# EAGLE board DIDV_-_Baixa_Latencia (EAGLE 6.2)
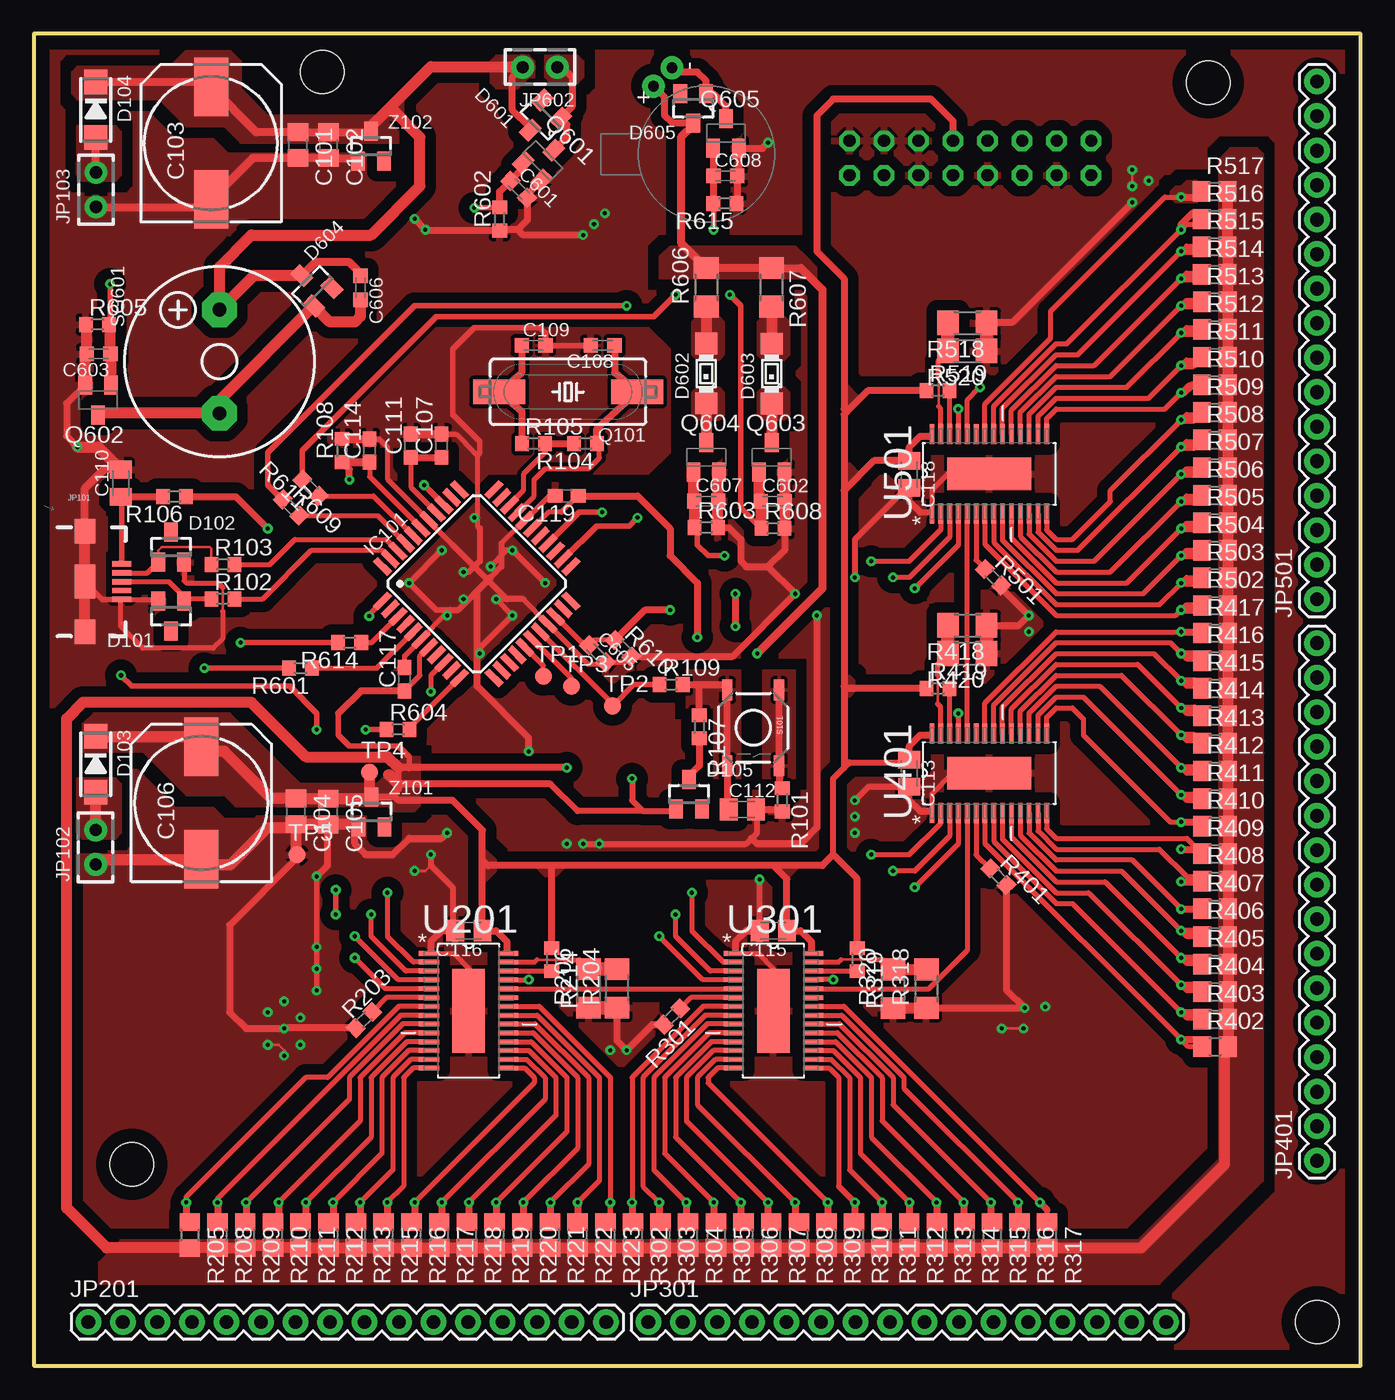
[diagram p0: board, top side]
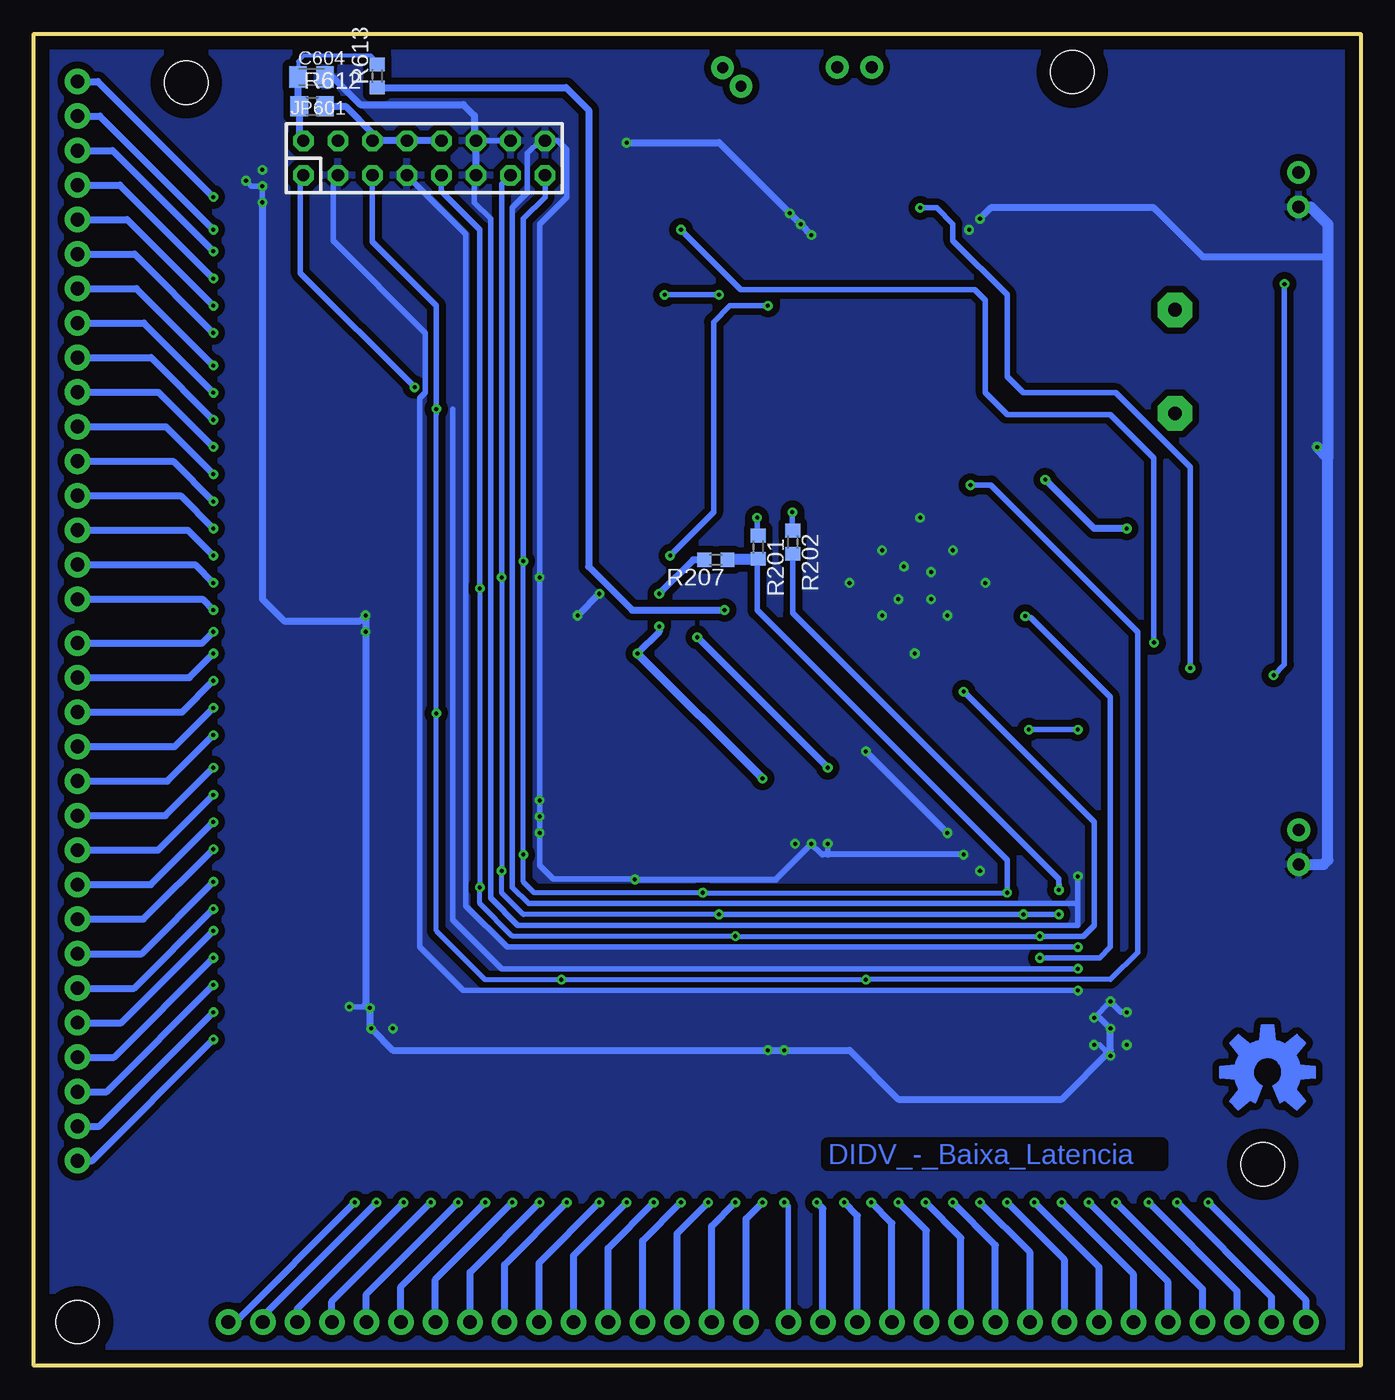
[diagram p1: board, bottom side, seen from below]

Size 97.6 x 98 mm. Coordinates in mm from the lower left corner, seen from the top.
Outline: 0,0 97.6,0 97.6,98 0,98 0,0
Copper layers (1*16): Top 0.035mm / dielectric 1.5mm / Bottom 0.035mm
Design rules: minimum track width 10mil, minimum drill 24mil, track to track 4mil, track to pad 4mil, pad to pad 4mil, via to via 4mil, smd to smd 4mil, copper to edge 40mil, drill to drill 8mil, minimum pad ring 10mil, minimum via ring 8mil, stop-mask expansion 4mil, vias tented up to drill 0mil, thermal gap 10mil
Holes 3.2 mm at 94.4,3.2 86.4,94.4 21.2,95.2 7.2,14.8

## Footprints (pad centres in the part's own frame; a part is rotated, then mirrored left to right if it is on the bottom)
C0805 = smd 1.3 x 1.5: 1 -0.95,0; 2 0.95,0
140CLH-1014 = smd 4.3 x 2.5: + 4.15,0; - -4.15,0
C0603 = smd 1.1 x 1: 1 -0.85,0; 2 0.85,0
C0603K = smd 1.05 x 1.08: 1 -0.875,0; 2 0.875,0
C0805K = smd 1.3 x 1.6: 1 -1,0; 2 1,0
SOT23 = smd 1 x 1.4: 1 -0.95,-1.1; 2 0.95,-1.1; 3 0,1.1
DO214AC = smd 1.8 x 1.7: A 2.05,0; C -2.05,0
SOT23@1 = smd 1 x 1.4: 1 -0.95,-1.1; 2 0.95,-1.1; 3 0,1.1
MINI-TOPLED-SANTANA = smd 1.6 x 1.6: A 0,2.2; C 0,-2.2
TQFP44 = smd 1.5 x 0.5: 1 -5.8,4; 2 -5.8,3.2; 3 -5.8,2.4; 4 -5.8,1.6; 5 -5.8,0.8; 6 -5.8,0; 7 -5.8,-0.8; 8 -5.8,-1.6; 9 -5.8,-2.4; 10 -5.8,-3.2; 11 -5.8,-4; 23 5.8,-4; 24 5.8,-3.2; 25 5.8,-2.4; 26 5.8,-1.6; 27 5.8,-0.8; 28 5.8,0; 29 5.8,0.8; 30 5.8,1.6; 31 5.8,2.4; 32 5.8,3.2; 33 5.8,4 | smd 0.5 x 1.5: 12 -4,-5.8; 13 -3.2,-5.8; 14 -2.4,-5.8; 15 -1.6,-5.8; 16 -0.8,-5.8; 17 0,-5.8; 18 0.8,-5.8; 19 1.6,-5.8; 20 2.4,-5.8; 21 3.2,-5.8; 22 4,-5.8; 34 4,5.8; 35 3.2,5.8; 36 2.4,5.8; 37 1.6,5.8; 38 0.8,5.8; 39 0,5.8; 40 -0.8,5.8; 41 -1.6,5.8; 42 -2.4,5.8; 43 -3.2,5.8; 44 -4,5.8
USB-B-MICRO-SMD_V03 = smd 1.4 x 0.4: D+1 2.7,0; D-1 2.7,0.65; GND1 2.7,-1.3; ID1 2.7,-0.65; VBUS1 2.7,1.3 | smd 1.5 x 1.8: SHIELD1 0,3.7; SHIELD2 0,-3.7 | smd 1.5 x 2.5: SHIELD3 0,0
JP1Y = drill 0.9 pad 1.676: 1 0,-1.27; 2 0,1.27
1X16 = drill 1.016 pad 1.88: 1 0,0; 2 2.54,0; 3 5.08,0; 4 7.62,0; 5 10.16,0; 6 12.7,0; 7 15.24,0; 8 17.78,0; 9 20.32,0; 10 22.86,0; 11 25.4,0; 12 27.94,0; 13 30.48,0; 14 33.02,0; 15 35.56,0; 16 38.1,0
JP8Q = drill 0.9 pad 1.5 octagon: 1 -8.89,-1.27; 2 -8.89,1.27; 3 -6.35,-1.27; 4 -6.35,1.27; 5 -3.81,-1.27; 6 -3.81,1.27; 7 -1.27,-1.27; 8 -1.27,1.27; 9 1.27,-1.27; 10 1.27,1.27; 11 3.81,-1.27; 12 3.81,1.27; 13 6.35,-1.27; 14 6.35,1.27; 15 8.89,-1.27; 16 8.89,1.27
SM49 = smd 3.81 x 1.778: 1 -5.08,0; 2 5.08,0
SOT23-BEC = smd 1 x 1.4: B -0.95,-1.1; C 0,1.1; E 0.95,-1.1
R0603 = smd 1 x 1.1: 1 -0.85,0; 2 0.85,0
R1206 = smd 1.6 x 1.803: 1 -1.422,0; 2 1.422,0
R0805 = smd 1.3 x 1.5: 1 -0.95,0; 2 0.95,0
TACTILE-SWITCH-SMD = smd 1.524 x 0.762: 1 -2.794,1.905; 2 2.794,1.905; 3 -2.794,-1.905; 4 2.794,-1.905
F/CM12P = drill 1.016 pad 2.54 octagon: + 3.81,0; - -3.81,0
B1,27 = smd 1.27 x 1.27: TP 0,0
SOP65P640X120-29N = smd 1.473 x 0.356: 1 -2.921,4.216; 2 -2.921,3.581; 3 -2.921,2.921; 4 -2.921,2.286; 5 -2.921,1.626; 6 -2.921,0.965; 7 -2.921,0.33; 8 -2.921,-0.33; 9 -2.921,-0.965; 10 -2.921,-1.626; 11 -2.921,-2.286; 12 -2.921,-2.921; 13 -2.921,-3.581; 14 -2.921,-4.216; 15 2.921,-4.216; 16 2.921,-3.581; 17 2.921,-2.921; 18 2.921,-2.286; 19 2.921,-1.626; 20 2.921,-0.965; 21 2.921,-0.33; 22 2.921,0.33; 23 2.921,0.965; 24 2.921,1.626; 25 2.921,2.286; 26 2.921,2.921; 27 2.921,3.581; 28 2.921,4.216 | smd 2.388 x 6.172: 29 0,0
VIBE-MOTOR-10MM = drill 0.8 pad 1.676: + -5,-3.9; - -6.35,-2.54

## Placement (x,y rotation side)
C101  100nf/50V  [C0805]  19.41,89.82 270 top
C102  100nf/50V  [C0805]  21.67,89.82 270 top
C103  470uf/35V  [140CLH-1014]  13.03,89.96 90 top
C104  100nf/50V  [C0805]  19.27,40.78 270 top
C105  100nf/50V  [C0805]  21.65,40.78 270 top
C106  470uf/35V  [140CLH-1014]  12.32,41.4 90 top
C107  100n  [C0603]  29.98,67.69 90 top
C108  15p  [C0603K]  41.84,75.07 180 top
C109  15p  [C0603K]  36.76,75.07 0 top
C110  10n  [C0805K]  6.38,64.94 90 top
C111  100n  [C0603]  27.72,67.69 90 top
C112  1u  [C0805K]  52.11,40.93 0 top
C113  10n  [C0805K]  64.4,43.59 270 top
C114  10n  [C0603]  24.7,67.34 90 top
C115  10n  [C0805K]  54.39,32 180 top
C116  10n  [C0805K]  31.99,32 180 top
C117  10n  [C0603]  27.27,50.51 90 top
C118  10n  [C0805K]  64.4,65.59 270 top
C119  10n  [C0603]  39.21,64 180 top
C601  10nf/50V  [C0603K]  35.66,86.57 315 top
C602  10n  [C0603K]  54.35,63.6 0 top
C603  10nf/50V  [C0603K]  4.75,74.44 180 top
C604  10n  [C0805K]  77.18,94.84 0 bottom
C605  10n  [C0603K]  41.44,52.38 315 top
C606  10nf/50V  [C0603K]  24.02,79.31 270 top
C607  10n  [C0603K]  49.46,63.62 0 top
C608  10nf/50V  [C0603K]  50.87,87.55 0 top
D101  ESDAXXL  [SOT23]  10.09,55.15 180 top
D102  ESDAXXL  [SOT23]  10.09,60.23 0 top
D103  S1J  [DO214AC]  4.53,44.25 270 top
D104  S1J  [DO214AC]  4.56,92.42 270 top
D105  BAS21  [SOT23@1]  48.19,42.05 0 top
D601  BAS70  [SOT23]  37.29,91.69 135 top
D602  [MINI-TOPLED-SANTANA]  49.46,73.01 0 top
D603  [MINI-TOPLED-SANTANA]  54.28,72.99 0 top
D604  BAS70  [SOT23]  20.48,79.44 45 top
D605  BAS70  [SOT23]  48.5,92.52 180 top
IC101  PIC18F4550_TQFP44  [TQFP44]  32.58,57.54 45 top
JP101  [USB-B-MICRO-SMD_V03]  3.74,57.69 0 top
JP102  [JP1Y]  4.54,38.14 0 top
JP103  [JP1Y]  4.56,86.54 0 top
JP201  M16PTH  [1X16]  4,3.2 0 top
JP301  M16PTH  [1X16]  45.2,3.2 0 top
JP401  M16PTH  [1X16]  94.4,15.07 90 top
JP501  M16PTH  [1X16]  94.4,56.4 90 top
JP601  [JP8Q]  68.89,88.87 0 bottom
JP602  Rele_40A  [JP1Y]  37.23,95.56 90 top
LOGO101  OSHW-LOGOL  [OSHW-LOGO-L]  6.84,21.59 0 top
Q101  [SM49]  39.3,71.66 180 top
Q601  BC817  [SOT23-BEC]  37.45,88.68 315 top
Q602  BC817  [SOT23-BEC]  4.72,71.06 180 top
Q603  BC817  [SOT23-BEC]  54.28,66.84 0 top
Q604  BC817  [SOT23-BEC]  49.46,66.84 0 top
Q605  BC817  [SOT23-BEC]  50.91,90.68 0 top
R101  100  [R0603]  55.05,41.63 270 top
R102  22R  [R0603]  13.9,56.42 0 top
R103  22R  [R0603]  13.9,58.96 0 top
R104  1M  [R0603]  40.57,67.85 180 top
R105  100  [R0603]  36.76,67.85 0 top
R106  10k  [R0603]  10.34,63.95 180 top
R107  10k  [R0603]  48.95,47.01 270 top
R108  100k  [R0603]  22.66,67.34 90 top
R109  1k5  [R0603]  46.88,50.11 0 top
R201  22  [R0603]  44.32,60.23 270 bottom
R202  22  [R0603]  41.78,60.6 270 bottom
R203  10k  [R0603]  24.28,25.44 45 top
R204  RX  [R1206]  42.88,27.76 90 top
R205  [R0805]  11.46,9.6 270 top
R206  [R1206]  40.8,27.76 90 top
R207  [R0603]  47.44,59.3 180 bottom
R208  [R0805]  13.5,9.61 270 top
R209  [R0805]  15.55,9.62 270 top
R210  [R0805]  17.59,9.61 270 top
R211  [R0805]  19.62,9.61 270 top
R212  [R0805]  21.66,9.61 270 top
R213  [R0805]  23.69,9.61 270 top
R214  10k  [R0603]  38.08,29.88 270 top
R215  [R0805]  25.72,9.61 270 top
R216  [R0805]  27.77,9.61 270 top
R217  [R0805]  29.81,9.61 270 top
R218  [R0805]  31.85,9.61 270 top
R219  [R0805]  33.89,9.61 270 top
R220  [R0805]  35.92,9.61 270 top
R221  [R0805]  37.95,9.62 270 top
R222  [R0805]  40,9.6 270 top
R223  [R0805]  42.04,9.61 270 top
R301  10k  [R0603]  46.94,25.68 225 top
R302  [R0805]  44.08,9.6 270 top
R303  [R0805]  46.1,9.61 270 top
R304  [R0805]  48.12,9.6 270 top
R305  [R0805]  50.17,9.61 270 top
R306  [R0805]  52.21,9.61 270 top
R307  [R0805]  54.24,9.61 270 top
R308  [R0805]  56.27,9.6 270 top
R309  [R0805]  58.3,9.6 270 top
R310  [R0805]  60.33,9.6 270 top
R311  [R0805]  62.36,9.61 270 top
R312  [R0805]  64.39,9.61 270 top
R313  [R0805]  66.43,9.61 270 top
R314  [R0805]  68.46,9.6 270 top
R315  [R0805]  70.48,9.6 270 top
R316  [R0805]  72.51,9.61 270 top
R317  [R0805]  74.54,9.61 270 top
R318  RX  [R1206]  65.65,27.74 90 top
R319  10k  [R0603]  60.55,29.88 270 top
R320  [R1206]  63.2,27.73 90 top
R401  10k  [R0603]  70.94,35.97 315 top
R402  [R0805]  86.91,23.47 0 top
R403  [R0805]  86.9,25.49 0 top
R404  [R0805]  86.91,27.52 0 top
R405  [R0805]  86.91,29.55 0 top
R406  [R0805]  86.9,31.58 0 top
R407  [R0805]  86.9,33.61 0 top
R408  [R0805]  86.9,35.64 0 top
R409  [R0805]  86.9,37.66 0 top
R410  [R0805]  86.9,39.7 0 top
R411  [R0805]  86.9,41.73 0 top
R412  [R0805]  86.9,43.76 0 top
R413  [R0805]  86.9,45.79 0 top
R414  [R0805]  86.9,47.82 0 top
R415  [R0805]  86.9,49.85 0 top
R416  [R0805]  86.9,51.88 0 top
R417  [R0805]  86.9,53.91 0 top
R418  RX  [R1206]  68.66,54.47 180 top
R419  10k  [R0603]  66.51,49.83 0 top
R420  [R1206]  68.67,52.4 180 top
R501  10k  [R0603]  70.57,58.02 315 top
R502  [R0805]  86.9,55.94 0 top
R503  [R0805]  86.89,57.97 0 top
R504  [R0805]  86.89,59.99 0 top
R505  [R0805]  86.89,62.02 0 top
R506  [R0805]  86.89,64.05 0 top
R507  [R0805]  86.88,66.09 0 top
R508  [R0805]  86.88,68.12 0 top
R509  [R0805]  86.88,70.14 0 top
R510  [R0805]  86.88,72.17 0 top
R511  [R0805]  86.88,74.22 0 top
R512  [R0805]  86.88,76.25 0 top
R513  [R0805]  86.87,78.28 0 top
R514  [R0805]  86.87,80.31 0 top
R515  [R0805]  86.87,82.34 0 top
R516  [R0805]  86.87,84.37 0 top
R517  [R0805]  86.86,86.41 0 top
R518  RX  [R1206]  68.67,76.72 180 top
R519  10k  [R0603]  66.51,71.75 0 top
R520  [R1206]  68.67,74.66 180 top
R601  2k  [R0603]  19.61,51.32 180 top
R602  1k3  [R0603]  34.26,84.37 90 top
R603  2k  [R0603]  49.46,61.67 0 top
R604  2k  [R0603]  26.79,46.82 0 top
R605  1k3  [R0603]  4.68,76.62 0 top
R606  110  [R1206]  49.46,79.36 90 top
R607  110  [R1206]  54.27,79.36 270 top
R608  2k  [R0603]  54.36,61.62 0 top
R609  3k  [R0603]  18.91,63.15 315 top
R610  100k  [R0603]  43.33,52.79 315 top
R611  3k  [R0603]  20.35,64.61 135 top
R612  100k  [R0805]  77.13,92.68 0 bottom
R613  10k  [R0603]  72.35,94.9 90 bottom
R614  2k  [R0603]  23.23,53.2 180 top
R615  1k3  [R0603]  50.83,85.52 180 top
S101  [TACTILE-SWITCH-SMD]  52.91,46.93 270 top
SG601  [F/CM12P]  13.65,73.89 90 top
TP1  TPB1,27  [B1,27]  37.48,50.72 0 top
TP2  TPB1,27  [B1,27]  42.57,48.54 0 top
TP3  TPB1,27  [B1,27]  39.55,49.99 0 top
TP4  TPB1,27  [B1,27]  24.68,43.66 0 top
TP5  TPB1,27  [B1,27]  19.34,37.59 0 top
U201  TLC5940QPWPREP  [SOP65P640X120-29N]  31.98,26.11 0 top
U301  TLC5940QPWPREP  [SOP65P640X120-29N]  54.39,26.11 0 top
U401  TLC5940QPWPREP  [SOP65P640X120-29N]  70.29,43.6 90 top
U501  TLC5940QPWPREP  [SOP65P640X120-29N]  70.29,65.61 90 top
U$601  MOTOR10MM  [VIBE-MOTOR-10MM]  49.48,89.16 270 top
Z101  5v6  [SOT23]  24.84,40.75 0 top
Z102  12V6  [SOT23]  24.79,89.74 0 top

## Library data of the parts
C101-C119 C601-C608 R101-R109 R201-R223 R301-R320 R401-R420 R501-R520 R601-R615 = rcl
D101-D105 D601 D604 D605 Z101 Z102 = diode
D602 D603 = led
IC101 = microchip
JP101 = SparkFun-Connectors; PROD_ID: CONN-11752
JP102 JP103 JP601 JP602 = jumper
JP201 JP301 JP401 JP501 = SparkFun-Connectors
LOGO101 = OpenHW_BOT
Q101 = crystal; OC_FARNELL: unknown; OC_NEWARK: unknown
Q601-Q605 = transistor-npn
S101 = SparkFun-Electromechanical; PROD_ID: SWCH-08247; VALUE: TAC_SWITCHSMD
SG601 = buzzer; OC_FARNELL: unknown; OC_NEWARK: unknown
TP1-TP5 = testpad
U201 U301 U401 U501 = Texas Instruments_By_element14_Batch_1; MPN: TLC5940QPWPREP; OC_FARNELL: -; OC_NEWARK: 79R8509; PACKAGE: TSSOP-28; SUPPLIER: Texas Instruments
U$601 = SparkFun-Electromechanical

## Nets
+12V: C101.1 C102.1 C103.+ C606.1 D104.C D601.3 D604.3 JP602.2 SG601.+ Z102.3
BLANK: IC101.24 R201.1
BLANK_: JP601.15 R201.2 R207.1 U201.2 U301.2 U401.2 U501.2
BUZZER: IC101.11 R604.2
D+: IC101.43 R102.2
D-: IC101.42 R103.2
EXPA: JP601.1 U501.24
GND: C101.2 C102.2 C103.- C104.2 C105.2 C106.- C107.2 C108.2 C109.2 C110.2 C111.2 C112.2 C113.2 C114.2 C115.2 C116.2 C117.2 C118.2 C119.2 C601.2 C602.2 C603.2 C604.2 C605.2 C607.2 C608.2 D101.2 D102.2 IC101.6 IC101.19 IC101.29 IC101.38 JP101.GND1 JP101.SHIELD1 JP101.SHIELD2 JP101.SHIELD3 JP102.1 JP103.1 JP601.3 JP601.7 JP601.11 JP601.12 JP601.14 JP601.16 Q601.E Q602.E Q603.E Q604.E Q605.E R101.2 R108.2 R203.1 R204.1 R206.1 R301.2 R318.1 R320.1 R401.2 R418.1 R420.1 R501.2 R518.1 R520.1 R602.1 R603.2 R605.1 R608.2 R610.2 R615.1 TP5.TP U201.1 U201.29 U301.1 U301.29 U401.1 U401.29 U501.1 U501.29 Z101.1 Z102.1
GSCLK: IC101.36 JP601.5 U201.25 U301.25 U401.25 U501.25
IR201: R204.2 R206.2 U201.27
IR301: R318.2 R320.2 U301.27
IR401: R418.2 R420.2 U401.27
IR501: R518.2 R520.2 U501.27
M00: JP201.1 R205.1 U201.7
M01: JP201.2 R208.1 U201.8
M02: JP201.3 R209.1 U201.9
M03: JP201.4 R210.1 U201.10
M04: JP201.5 R211.1 U201.11
M05: JP201.6 R212.1 U201.12
M06: JP201.7 R213.1 U201.13
M07: JP201.8 R215.1 U201.14
M08: JP201.9 R216.1 U201.15
M09: JP201.10 R217.1 U201.16
M10: JP201.11 R218.1 U201.17
M11: JP201.12 R219.1 U201.18
M12: JP201.13 R220.1 U201.19
M13: JP201.14 R221.1 U201.20
M14: JP201.15 R222.1 U201.21
M15: JP201.16 R223.1 U201.22
M16: JP301.1 R302.1 U301.7
M17: JP301.2 R303.1 U301.8
M18: JP301.3 R304.1 U301.9
M19: JP301.4 R305.1 U301.10
M20: JP301.5 R306.1 U301.11
M21: JP301.6 R307.1 U301.12
M22: JP301.7 R308.1 U301.13
M23: JP301.8 R309.1 U301.14
M24: JP301.9 R310.1 U301.15
M25: JP301.10 R311.1 U301.16
M26: JP301.11 R312.1 U301.17
M27: JP301.12 R313.1 U301.18
M28: JP301.13 R314.1 U301.19
M29: JP301.14 R315.1 U301.20
M30: JP301.15 R316.1 U301.21
M31: JP301.16 R317.1 U301.22
M32: JP401.1 R402.1 U401.7
M33: JP401.2 R403.1 U401.8
M34: JP401.3 R404.1 U401.9
M35: JP401.4 R405.1 U401.10
M36: JP401.5 R406.1 U401.11
M37: JP401.6 R407.1 U401.12
M38: JP401.7 R408.1 U401.13
M39: JP401.8 R409.1 U401.14
M40: JP401.9 R410.1 U401.15
M41: JP401.10 R411.1 U401.16
M42: JP401.11 R412.1 U401.17
M43: JP401.12 R413.1 U401.18
M44: JP401.13 R414.1 U401.19
M45: JP401.14 R415.1 U401.20
M46: JP401.15 R416.1 U401.21
M47: JP401.16 R417.1 U401.22
M48: JP501.1 R502.1 U501.7
M49: JP501.2 R503.1 U501.8
M50: JP501.3 R504.1 U501.9
M51: JP501.4 R505.1 U501.10
M52: JP501.5 R506.1 U501.11
M53: JP501.6 R507.1 U501.12
M54: JP501.7 R508.1 U501.13
M55: JP501.8 R509.1 U501.14
M56: JP501.9 R510.1 U501.15
M57: JP501.10 R511.1 U501.16
M58: JP501.11 R512.1 U501.17
M59: JP501.12 R513.1 U501.18
M60: JP501.13 R514.1 U501.19
M61: JP501.14 R515.1 U501.20
M62: JP501.15 R516.1 U501.21
M63: JP501.16 R517.1 U501.22
MCLR: IC101.18 R109.1 TP2.TP
N$1: D105.3 R107.2
N$2: D102.1 JP101.D-1 R103.1
N$3: D101.1 JP101.D+1 R102.1
N$4: C606.2 D604.1 Q602.C SG601.-
N$5: C109.1 Q101.2 R105.1
N$6: IC101.27
N$7: IC101.2
N$8: IC101.25
N$9: D602.A R606.1
N$10: C603.1 Q602.B R604.1 R605.2
N$11: IC101.14
N$12: IC101.15
N$13: R401.1 U401.6
N$14: IC101.35
N$16: IC101.22
N$17: R501.1 U501.6
N$18: D603.A R607.2
N$19: IC101.44
N$20: IC101.32
N$21: D104.A JP103.2
N$22: IC101.21
N$23: IC101.10
N$24: D602.C Q604.C
N$26: IC101.4
N$27: D103.A JP102.2
N$28: D603.C Q603.C
N$29: C602.1 Q603.B R608.1 R611.2
N$30: C607.1 Q604.B R603.1 R609.1
N$31: C608.1 Q605.B R614.2 R615.2
N$32: R203.2 U201.6
N$34: D605.1 Q605.C U$601.-
N$35: R319.2 U301.26
N$45: R101.1 S101.1 S101.2
N$46: IC101.23
N$47: D601.1 JP602.1 Q601.C
N$48: C601.1 Q601.B R601.2 R602.2
N$53: R419.2 U401.26
N$62_: R519.2 U501.26
N$64: R214.2 U201.26
OSC1: C108.1 IC101.30 Q101.1 R104.1
OSC2: IC101.31 R104.2 R105.2
PGC: IC101.16 TP1.TP
PGD: IC101.17 TP3.TP
RA: C604.1 JP601.2 R612.1 R613.2
RA_2: C605.1 IC101.20 R610.1 R613.1
RB: JP601.4
SCLK: IC101.9 JP601.9 U201.4 U301.4 U401.4 U501.4
SIN: IC101.1 U201.5
SOUT201: U201.24 U301.5
SOUT301: U301.24 U401.5
SOUT401: U401.24 U501.5
SOUT_: IC101.8
TM_EN: IC101.5 R601.1
U_MCLR: C112.1 R107.1 R109.2 S101.3 S101.4
USB_IN: C114.1 IC101.39 R106.1 R108.1
USBCON: IC101.41 R609.2
USBTXRX: IC101.40 R611.1
VCC: C104.1 C105.1 C106.+ C113.1 C115.1 C116.1 C117.1 C118.1 C119.1 D103.C D105.1 D605.3 IC101.7 IC101.28 JP601.6 JP601.8 JP601.10 R205.2 R207.2 R208.2 R209.2 R210.2 R211.2 R212.2 R213.2 R214.1 R215.2 R216.2 R217.2 R218.2 R219.2 R220.2 R221.2 R222.2 R223.2 R302.2 R303.2 R304.2 R305.2 R306.2 R307.2 R308.2 R309.2 R310.2 R311.2 R312.2 R313.2 R314.2 R315.2 R316.2 R317.2 R319.1 R402.2 R403.2 R404.2 R405.2 R406.2 R407.2 R408.2 R409.2 R410.2 R411.2 R412.2 R413.2 R414.2 R415.2 R416.2 R417.2 R419.1 R502.2 R503.2 R504.2 R505.2 R506.2 R507.2 R508.2 R509.2 R510.2 R511.2 R512.2 R513.2 R514.2 R515.2 R516.2 R517.2 R519.1 R606.2 R607.1 R612.2 TP4.TP U201.28 U301.28 U401.28 U501.28 U$601.+ Z101.3
VM: IC101.3 R614.1
VPRG_: R301.1 U301.6
VUSB: C110.1 JP101.VBUS1 R106.2
VUSB_: C107.1 C111.1 IC101.37
XLAT: IC101.26 R202.1
XLAT_: JP601.13 R202.2 U201.3 U301.3 U401.3 U501.3

## Tracks (layer width: path | path; a pad name or v marks a point on that pad's centre or on a via)
+12V
  Top 0.5: D601.3 36.51,91.09 35.2,92.4 35.2,94.8 35.6,95.2 JP602.2
  Top 0.6: D104.C 12.67,94.47 C103.+ 16.37,90.77 C101.1 C102.1 24.72,90.77 Z102.3 | C606.1 24.02,80.38 23.2,81.2 20.68,81.2 D604.3
  Top 0.8: Z102.3 24.79,91.19 26.2,92.6 | 26.2,92.6 29.2,95.6 35.2,95.6 35.6,95.2 | 26.2,92.6 28.4,90.4 28.4,86.8 24.8,83.2 16,83.2 13.65,80.85 SG601.+ 16.16,80.22 D604.3
  pour Top (no thermals): 5.6,93.2 3.2,93.2 2.8,93.6 2.8,95.2 3.2,95.6 10,95.6 11.2,96.8 14.4,96.8 15.2,96 15.2,94 17.2,92 24.4,92 25.6,92 26.8,90.8 26.8,90 15.2,90 14,91.2 11.2,91.2 9.2,93.2
  pour Top (no thermals): 36.8,94.8 36.4,94.8 35.6,94 34,94 33.6,94.4 33.6,96 34,96.4 36.4,96.4 36.8,96
  pour Top (no thermals): 26.4,92.8 27.2,93.6 27.2,92 26.8,91.6 25.2,91.6
BLANK  (via drill 0.3)
  Top 0.4: IC101.24 38.97,59.37 41.4,61.8 43.8,61.8 v44.4,62.4
  Bottom 0.4: v44.4,62.4 44.4,61.16 R201.1
BLANK_  (via drill 0.3)
  Top 0.35: v26,34.8 26,31.6 27.91,29.69 U201.2 | v61.6,37.6 64.4,37.6 66.71,39.91 U401.2 | v61.6,59.2 64.4,59.2 66.71,61.51 U501.2 | v48.4,34.8 48.4,32 50.71,29.69 U301.2
  Bottom 0.35: v61.6,59.2 v61.6,37.6 61.6,35.6 60.8,34.8 v48.4,34.8 v26,34.8
  Bottom 0.4: v26,34.8 26,37.2 44.4,55.6 44.4,59.3 R201.2 | v61.6,59.2 61.6,84.4 60,86 JP601.15
  Bottom 0.8: 44.4,59.3 R207.1
BUZZER
  Top 0.35: R604.2 27.64,46.94 IC101.11
D+
  Top 0.35: R102.2 16.82,56.42 20.4,60 25.59,60 IC101.43
D-
  Top 0.35: R103.2 17.36,58.96 19.2,60.8 25.92,60.8 IC101.42
EXPA  (via drill 0.3)
  Top 0.35: U501.24 68.66,71.06 v69.6,72
  Bottom 0.4: v69.6,72 78,80.4 78,87.38 JP601.1
GND  (via drill 0.3)
  Top 0.2: 13.9,57.24 13.9,55.52 | v80.8,88 v80.8,86.8 | v17.2,23.6 18,23.6 18.4,23.2 v18.4,22.8 | v28,36.4 28.8,36.4 29.2,36.8 | v71.2,24.8 v72.8,24.8
  Top 0.35: 51.6,30.45 U301.1 53.27,30.33 54.4,29.2 U301.29 | 65.95,40.8 U401.1 66.07,42.07 67.6,43.6 | C119.2 37.91,64 IC101.29 36.1,62.2 34.4,60.5 | C117.2 27.27,52.23 IC101.6 28.48,53.47 30.3,55.3 30.62,55.61 | D101.2 9,56.39 JP101.GND1 6.4,56.35 6.4,54.4 8,52.8 13.2,52.8 13.87,53.47 13.87,55.5 13.9,55.52 | D102.2 11.04,57.76 11.2,57.6 13.54,57.6 13.9,57.24 | R610.2 43.51,51.76 C605.2 41.76,51.76 41.6,51.6 40.78,51.6 IC101.19 37.81,54.59 36,56.4 | C114.2 25.41,68.19 26,67.6 26,65.25 IC101.38 29.04,62.16 30.8,60.4 | C107.2 31.06,68.54 32.4,67.2 32.61,66.99 32.61,61.78 32.8,61.6 | 32,26.13 32,29.2 30.87,30.33 U201.1 29.2,30.46 | U501.29 67.21,65.61 66.07,64.47 U501.1 65.97,62.8
  Top 0.4: JP101.GND1 5.04,56.39 JP101.SHIELD3 | C108.2 C109.2 37.63,75.97 37.2,76.4 32.4,76.4 30.8,74.8 30.8,70 32.8,68 32.8,67.17 32.61,66.99 | v20.8,36 v20.8,30.8 v20.8,29.2 v20.8,27.6
  Top 0.406: v32.8,52.4 32.8,52.8 v35.2,55.2 v34,56.4 34.8,56.4 | v37.6,57.6 v35.2,60 34.8,60 | 34.8,60 v33.6,58.8 | v30,60 v27.6,57.6 29.59,55.61 30.62,55.61 | v31.6,56.4 31.6,56 31.21,55.61 | v30.4,55.2 30.3,55.3 | v31.6,58.4 32,58.4 32.4,58.8 | 34.8,60 34.4,60
  Top 0.45: 36,56.4 34.8,56.4 33.4,57.8 | 33.4,57.8 32.4,58.8 | 32.4,58.8 30.8,60.4 | 30.62,55.61 31.21,55.61 33.4,57.8 | 32.8,61.6 32.8,59.2 32.4,58.8 | 34.4,60.5 34.4,60 34.4,58.8 33.6,58 33.4,57.8 | v29.19,37.59 v29.2,37.6 29.2,36.8 30.8,35.2 30.8,32.19 C116.2 | v40.4,38.4 v41.6,38.4 52.4,38.4 52.8,38.8 53.2,39.2 53.2,40.84 C112.2 | C115.2 v53.39,35.77 v53.39,35.78 | v60.4,41.6 61.39,42.59 C113.2 64.4,41.6 | v60.4,58 60.4,60.8 64.19,64.59 C118.2 64.4,63.6 | 32,26.13 U201.29 | U301.29 | 67.6,43.6 U401.29 | 65.2,62.8 65.97,62.8
  Top 0.5: 51.6,30.45 51.6,31.2 52.4,32 C115.2 | 64.4,41.6 65.2,40.8 65.95,40.8 | 64.4,63.6 65.2,62.8 | C112.2 54.9,40.93 R101.2 | R615.1 51.74,85.59 C608.2 51.86,87.67 Q605.E 53.58,89.58 v54,90 | Q601.E 36.28,86.16 C601.2 36.28,84.28 35.6,83.6 | 35.6,83.6 34.34,83.6 R602.1 28.88,83.52 v28.8,83.6 v28,84.4 | R204.1 42.88,23.91 v43.6,23.2 45.48,25.08 R301.2 | R401.2 71.55,27.65 v72.89,26.31 R318.1 | R501.2 71.17,57.23 v73.2,55.2 72.47,54.47 R418.1 | 70.4,76.8 72,76.8 v80.8,85.6 | R203.1 18.44,24.84 v18.4,24.8 15.6,24.8 14.4,26 14.4,32.4 19.34,37.34 TP5.TP | 55.22,61.63 55.22,60.02 54,58.8 | R603.2 51.13,61.67 52,60.8 52,59.2 52.4,58.8 54,58.8 | 54,58.8 v56,56.8 51.39,52.19 R610.2 | v57.6,55.2 57.6,39.6 56.4,38.4 53.2,38.4 52.8,38.8 | v30.4,39.2 30,38.8 27.6,38.8 26.4,37.6 24.4,37.6 23.6,38.4 23.6,39.36 Z101.1 | v36.4,45.2 36.4,46.2 32.6,50 32.6,57 33.6,58 | Q602.E 2.4,70.8 2.4,68.4 v3.2,67.6 | v40.4,83.2 36,83.2 35.6,83.6 | v20.8,36 21.6,36.8 21.6,39.78 | C116.2 30,32 29.2,31.2 29.2,30.46
  Top 0.6: JP103.1 12.49,85.27 C103.- 16.09,88.87 C101.2 C102.2 23.61,88.87 Z102.1 | JP101.SHIELD1 3.74,64.54 5.2,66 6.44,66 | 6.8,66 6.44,66 | 6.44,66 C110.2 | R108.2 C114.2 | C111.2 C107.2
  Top 0.8: JP101.SHIELD1 JP101.SHIELD3 JP101.SHIELD2 | Q603.E C602.2 55.22,61.63 R608.2 | R603.2 50.31,63.59 C607.2 50.34,65.67 Q604.E | Q602.E 3.77,74.34 C603.2 3.88,76.56 R605.1 | C104.2 19.27,37.66 TP5.TP | Z101.1 23.71,39.83 C105.2 | C105.2 | v3.2,67.6 4.72,67.6 C110.2 | JP102.1 4.87,37.2 12.37,37.2 C106.- 11.93,36.87 14.47,36.87 17.2,39.6 19.04,39.6 C104.2 | C105.2 C104.2 | 21.6,39.78 C105.2 | R320.1 R318.1
  Top 1: 70.4,76.8 70.33,76.72 R518.1 R520.1 | R420.1 R418.1 | R206.1 R204.1
  Bottom 0.2: v18.4,22.8 18.4,23.2
  Bottom 0.4: 65.83,57.86 65.83,33.83 62.8,30.8 v20.8,30.8 | 65.83,57.86 65.82,57.87 | 20.8,34 61.2,34 62.4,35.2 62.4,85.2 61.29,86.31 61.29,89.21 60.37,90.14 JP601.16 59.07,90.14 58.4,89.47 58.4,86 60.4,84 v60.4,58 v60.4,41.6 v60.4,40.4 v60.4,39.2 60.4,36.8 59.4,35.8 53.66,35.8 v53.39,35.78 | 66.8,70.4 66.8,32.8 63.2,29.2 v20.8,29.2 | JP601.11 65.2,87.48 65.2,85.6 64,84.4 64,34.4 62,32.4 20.8,32.4 20.8,34 | JP601.3 75.6,87.24 75.6,82.8 68.8,76 68.8,71.6 69.2,71.2 69.2,30.8 66,27.6 v20.8,27.6 | v20.8,36 20.8,34 | 65.83,57.86 65.83,83.27 JP601.7 70,87.6 | v17.2,26 17.6,26 v18.4,26.8 v19.6,25.6 19.2,25.6 v18.4,24.8 | v19.6,23.6 19.2,23.6 v18.4,22.8 | v39.2,38.4 39.2,37.6 | v74.4,26.4 72.97,26.4 v72.89,26.31 | v80.8,85.6 v80.8,86.8 81.6,86.8 v82,87.2 | JP601.12 JP601.14
  Bottom 0.45: v29.2,37.6 39.2,37.6 39.6,37.6 v40.4,38.4 43.02,35.78 v53.39,35.78
  Bottom 0.5: C604.2 75.64,94.84 73.6,92.8 66,92.8 65.2,92 65.2,90.26 JP601.12 JP601.11 | v80.8,85.6 80.8,56.4 79.2,54.8 73.6,54.8 v73.2,55.2 v73.2,54 73.2,26.63 v72.89,26.31 72.89,24.89 v72.8,24.8 71.2,23.2 v43.6,23.2 v42.4,23.2 37.6,23.2 34,19.6 22,19.6 18.4,23.2 v18.4,24.8 | v56,56.8 v57.6,55.2 | v30.4,39.2 v36.4,45.2 | 2.4,81.6 11.6,81.6 15.2,85.2 27.2,85.2 v28,84.4 | v54,90 47.2,90 v42,84.8 v41.2,84 v40.4,83.2
  Bottom 0.8: JP102.1 2.73,36.87 2.4,37.2 2.4,66.8 | 2.4,66.8 v3.2,67.6 | JP103.1 3.67,85.27 2.4,84 2.4,81.6 2.4,66.8
  other vias: 32.4,62.4
  pour Bottom: 32.78,63.38 38.35,57.81 38.35,57.44 32.78,51.87 32.41,51.87 26.83,57.44 26.83,57.81 32.41,63.38
  pour Top: 32.78,63.38 38.35,57.81 38.35,57.44 32.78,51.87 32.41,51.87 26.83,57.44 26.83,57.81 32.41,63.38
  pour Bottom (isolate 0.5): 0,98 97.6,98 97.6,0 0,0
  pour Top (isolate 0.3): 33.2,76.4 45.2,76.4 46.8,74.8 46.8,67.2 45.2,65.6 32.8,65.6 32,66.4 32,67.2 31.2,68 27.2,68 26.8,67.6 22,67.6 21.6,68 21.6,68.4 22.4,69.2 29.6,76.4
  pour Top (no thermals): 3.6,37.6 3.2,37.6 3.2,35.6 10,35.6 11.2,34.4 14,34.4 15.2,35.6 18,38.4 20.8,38.4 24,38.4 24.4,38.8 24.4,40.4 16.4,40.4 15.6,39.6 8.8,39.6 7.6,38.4 7.2,38 6.8,37.6
  pour Top (no thermals): 4.8,63.2 1.2,63.2 1.2,52.8 2,52 4.8,52 5.2,52.4 5.2,62.8
  pour Top (no thermals): 6,86 3.6,86 3.2,85.6 3.2,84.4 3.6,84 10.8,84 11.6,83.2 14.4,83.2 14.8,83.6 14.8,86 15.2,86.4 23.6,86.4 24.4,87.2 24.4,89.2 12.8,89.2 11.2,87.6 11.2,86.8 10.4,86
  pour Top (isolate 0.8, rank 6): 0,98 97.6,98 97.6,0 0,0
  pour Bottom (no thermals): 2.4,82.8 2.8,82.8 3.6,82 3.6,81.2 2.8,80.4 2.4,80.4
GSCLK  (via drill 0.3)
  Top 0.35: U201.25 v36.4,28.4 | v58.8,28.4 U301.25 | v68,48 U401.25 | v68,70.4 U501.25
  Top 0.4: IC101.36 v28.7,64.8
  Bottom 0.35: v58.8,28.4 v36.4,28.4 18.4,28.4 16.4,30.4 | v58.8,28.4 | v68,70.4 68,70 v68,48 68,32 64.4,28.4 v58.8,28.4
  Bottom 0.4: v28.7,64.8 27.2,64.8 16.4,54 16.4,30.4 | JP601.5 72.7,82.7 68,78 v68,70.4
IR201
  Top 0.2: 36.99,29.86 39.05,29.86
  Top 0.35: U201.27 36.82,29.69 36.99,29.86 | R206.2 40.12,29.86 39.05,29.86
  Top 1: R206.2 R204.2
IR301
  Top 0.2: 59.38,29.88 61.58,29.88
  Top 0.35: U301.27 59.19,29.69 59.38,29.88 | 61.58,29.88 62.47,29.88 R320.2
  Top 0.8: R320.2 R318.2
IR401
  Top 0.2: 66.49,48.69 66.49,50.81
  Top 0.35: U401.27 66.71,48.47 66.49,48.69 | 66.49,50.81 66.49,51.65 R420.2
  Top 1: R420.2 R418.2
IR501
  Top 0.2: 66.55,70.6 66.55,72.8
  Top 0.35: U501.27 66.71,70.44 66.55,70.6 | 66.55,72.8 66.55,73.96 R520.2
  Top 1: R520.2 R518.2
M00  (via drill 0.3)
  Top 0.35: U201.7 26.84,26.44 21.6,21.2 20,21.2 11.2,12.4 v11.2,12
  Top 0.5: v11.2,12 11.2,10.81 R205.1
  Bottom 0.5: JP201.1 4,4.8 v11.2,12
M01  (via drill 0.3)
  Top 0.35: U201.8 26.98,25.78 13.5,12.3 v13.5,12
  Top 0.4: 13.6,10.66 R208.1
  Top 0.5: v13.5,12 R208.1
  Bottom 0.5: JP201.2 6.54,5.04 v13.5,12
M02  (via drill 0.3)
  Top 0.35: U201.9 27.15,25.15 23.2,21.2 23.2,19.6 v15.6,12
  Top 0.5: v15.6,12 15.6,10.62 R209.1
  Bottom 0.5: JP201.3 9.08,5.48 v15.6,12
M03  (via drill 0.3)
  Top 0.35: U201.10 27.29,24.49 24,21.2 24,18 v18,12
  Top 0.5: v18,12 18,10.97 R210.1
  Bottom 0.5: JP201.4 11.62,5.62 v18,12
M04  (via drill 0.3)
  Top 0.35: U201.11 27.43,23.82 24.8,21.2 24.8,16.8 v20,12
  Top 0.5: v20,12 20,10.94 R211.1
  Bottom 0.5: JP201.5 14.16,6.16 v20,12
M05  (via drill 0.3)
  Top 0.35: U201.12 27.59,23.19 25.6,21.2 25.6,15.6 v22,12
  Top 0.5: v22,12 22,10.9 R212.1
  Bottom 0.5: JP201.6 16.7,6.7 v22,12
M06  (via drill 0.3)
  Top 0.35: U201.13 27.73,22.53 26.4,21.2 26.4,14.4 v24,12
  Top 0.5: v24,12 24,10.87 R213.1
  Bottom 0.5: JP201.7 19.24,7.24 v24,12
M07  (via drill 0.3)
  Top 0.35: U201.14 27.89,21.89 27.2,21.2 27.2,13.2 v26,12
  Top 0.5: v26,12 26,10.84 R215.1
  Bottom 0.5: JP201.8 21.78,7.78 v26,12
M08  (via drill 0.3)
  Top 0.35: U201.15 36.1,21.89 36.8,21.2 36.8,20.8 v28,12
  Top 0.5: v28,12 28,10.79 R216.1
  Bottom 0.5: JP201.9 24.32,8.32 v28,12
M09  (via drill 0.3)
  Top 0.35: U201.16 36.27,22.53 37.6,21.2 37.6,19.6 v30,12
  Top 0.5: v30,12 30,10.75 R217.1
  Bottom 0.5: JP201.10 26.86,8.86 v30,12
M10  (via drill 0.3)
  Top 0.35: U201.17 36.41,23.19 38.4,21.2 38.4,18.4 v32,12
  Top 0.5: v32,12 32,10.71 R218.1
  Bottom 0.5: JP201.11 29.4,9.4 v32,12
M11  (via drill 0.3)
  Top 0.35: U201.18 36.58,23.82 39.2,21.2 39.2,17.2 v34,12
  Top 0.5: v34,12 34,10.67 R219.1
  Bottom 0.5: JP201.12 31.94,9.94 v34,12
M12  (via drill 0.3)
  Top 0.35: U201.19 36.71,24.49 40,21.2 40,16 v36,12
  Top 0.5: v36,12 36,10.64 R220.1
  Bottom 0.5: JP201.13 34.48,10.48 v36,12
M13  (via drill 0.3)
  Top 0.35: U201.20 36.85,25.15 40.8,21.2 40.8,14.8 v38,12
  Top 0.5: v38,12 38,10.61 R221.1
  Bottom 0.5: JP201.14 37.02,11.02 v38,12
M14  (via drill 0.3)
  Top 0.35: U201.21 37.02,25.78 41.6,21.2 41.6,13.6 v40,12
  Top 0.5: v40,12 R222.1
  Bottom 0.5: JP201.15 39.56,11.56 v40,12
M15  (via drill 0.3)
  Top 0.35: U201.22 37.16,26.44 42.4,21.2 v42.4,12
  Top 0.4: v42.4,12 42.4,10.92 R223.1
  Bottom 0.4: JP201.16 42.1,11.7 v42.4,12
M16  (via drill 0.3)
  Top 0.35: U301.7 49.24,26.44 44,21.2 v44,12
  Top 0.5: v44,12 44,10.63 R302.1
  Bottom 0.5: JP301.1 45.2,10.8 v44,12
M17  (via drill 0.3)
  Top 0.35: U301.8 49.38,25.78 44.8,21.2 44.8,13.2 v46,12
  Top 0.5: v46,12 46,10.66 R303.1
  Bottom 0.5: JP301.2 47.74,10.26 v46,12
M18  (via drill 0.3)
  Top 0.35: U301.9 49.55,25.15 45.6,21.2 45.6,14.4 v48,12
  Top 0.5: v48,12 48,10.68 R304.1
  Bottom 0.5: JP301.3 50.28,9.72 v48,12
M19  (via drill 0.3)
  Top 0.35: U301.10 49.69,24.49 46.4,21.2 46.4,15.6 v50,12
  Top 0.5: v50,12 50,10.73 R305.1
  Bottom 0.5: JP301.4 52.82,9.18 v50,12
M20  (via drill 0.3)
  Top 0.35: U301.11 49.83,23.82 47.2,21.2 47.2,16.8 v52,12
  Top 0.5: v52,12 52,10.77 R306.1
  Bottom 0.5: JP301.5 55.36,8.64 v52,12
M21  (via drill 0.3)
  Top 0.35: U301.12 49.99,23.19 48,21.2 48,18 v54,12
  Top 0.5: v54,12 54,10.8 R307.1
  Bottom 0.5: JP301.6 57.9,8.1 v54,12
M22  (via drill 0.3)
  Top 0.35: U301.13 50.13,22.53 48.8,21.2 48.8,19.2 v56,12
  Top 0.5: v56,12 56,10.83 R308.1
  Bottom 0.5: JP301.7 60.44,7.56 v56,12
M23  (via drill 0.3)
  Top 0.35: U301.14 50.3,21.89 49.6,21.2 49.6,20.8 v58.4,12
  Top 0.5: v58.4,12 58.4,10.65 R309.1
  Bottom 0.5: JP301.8 62.98,7.42 v58.4,12
M24  (via drill 0.3)
  Top 0.35: U301.15 58.51,21.89 59.2,21.2 59.2,13.2
  Top 0.4: 59.2,13.2 v60.4,12
  Top 0.5: v60.4,12 60.4,10.62 R310.1
  Bottom 0.5: JP301.9 65.52,6.88 v60.4,12
M25  (via drill 0.3)
  Top 0.35: U301.16 58.67,22.53 60,21.2 60,14.4 v62.4,12
  Top 0.5: v62.4,12 62.4,10.6 R311.1
  Bottom 0.5: JP301.10 68.06,6.34 v62.4,12
M26  (via drill 0.3)
  Top 0.35: U301.17 58.81,23.19 60.8,21.2 60.8,15.6 v64.4,12
  Top 0.5: v64.4,12 R312.1
  Bottom 0.5: JP301.11 70.6,5.8 v64.4,12
M27  (via drill 0.3)
  Top 0.35: U301.18 58.98,23.82 61.6,21.2 61.6,16.8 v66.4,12
  Top 0.5: v66.4,12 66.4,10.58 R313.1
  Bottom 0.5: JP301.12 73.14,5.26 v66.4,12
M28  (via drill 0.3)
  Top 0.35: U301.19 59.11,24.49 62.4,21.2 62.4,18 v68.4,12
  Top 0.5: v68.4,12 68.4,10.61 R314.1
  Bottom 0.5: JP301.13 75.68,4.72 v68.4,12
M29  (via drill 0.3)
  Top 0.35: U301.20 59.25,25.15 63.2,21.2 63.2,19.2 v70.4,12
  Top 0.5: v70.4,12 70.4,10.64 R315.1
  Bottom 0.5: JP301.14 78.22,4.18 v70.4,12
M30  (via drill 0.3)
  Top 0.35: U301.21 59.42,25.78 64,21.2 64,20.4 v72.4,12
  Top 0.5: v72.4,12 72.4,10.67 R316.1
  Bottom 0.5: JP301.15 80.76,3.64 v72.4,12
M31  (via drill 0.3)
  Top 0.35: U301.22 59.56,26.44 v74,12 | R317.1 74.54,11.46
  Top 0.5: v74,12 74.54,11.46
  Bottom 0.5: JP301.16 82.8,3.2 v74,12
M32  (via drill 0.3)
  Top 0.35: U401.7 69.96,38.44 v84.4,24 84.93,23.47 R402.1
  Top 0.5: v84.4,24 85.42,24 R402.1
  Bottom 0.5: JP401.1 93.33,15.07 v84.4,24
M33  (via drill 0.3)
  Top 0.35: U401.8 70.62,38.58 75.2,34 76.4,34 v84.4,26 84.8,25.6 85.85,25.6 R403.1
  Top 0.5: v84.4,26 85.45,26 R403.1
  Bottom 0.5: JP401.2 92.79,17.61 v84.4,26
M34  (via drill 0.3)
  Top 0.35: U401.9 71.25,38.75 75.2,34.8 77.6,34.8 v84.4,28 84.8,27.6 85.88,27.6 R404.1
  Top 0.5: v84.4,28 85.47,28 R404.1
  Bottom 0.5: JP401.3 92.25,20.15 v84.4,28
M35  (via drill 0.3)
  Top 0.35: U401.10 71.91,38.89 75.2,35.6 78.8,35.6 v84.4,30 84.8,29.6 85.9,29.6 R405.1
  Top 0.5: v84.4,30 85.5,30 R405.1
  Bottom 0.5: JP401.4 91.71,22.69 v84.4,30
M36  (via drill 0.3)
  Top 0.35: U401.11 72.58,39.02 75.2,36.4 80,36.4 v84.4,32 84.8,31.6 85.93,31.6 R406.1
  Top 0.5: v84.4,32 85.53,32 R406.1
  Bottom 0.5: JP401.5 91.17,25.23 v84.4,32
M37  (via drill 0.3)
  Top 0.35: U401.12 73.21,39.19 75.2,37.2 80.8,37.2 v84.4,33.6
  Top 0.5: v84.4,33.6 R407.1
  Bottom 0.5: JP401.6 90.23,27.77 v84.4,33.6
M38  (via drill 0.3)
  Top 0.35: U401.13 73.87,39.33 75.2,38 82.8,38 84.8,36 85.59,36 R408.1
  Top 0.5: v84.4,35.6 85.91,35.6 R408.1
  Bottom 0.5: JP401.7 89.69,30.31 v84.4,35.6
M39  (via drill 0.3)
  Top 0.35: U401.14 74.5,39.49 75.2,38.8 84.82,38.8 R409.1
  Top 0.5: v84.4,38 85.62,38 R409.1
  Bottom 0.5: JP401.8 89.55,32.85 v84.4,38
M40  (via drill 0.3)
  Top 0.35: U401.15 74.5,47.7 75.2,48.4 76.4,48.4 77.2,47.6 77.2,46.4 83.6,40 v84.4,40
  Top 0.5: v84.4,40 85.65,40 R410.1
  Bottom 0.5: JP401.9 89.01,35.39 v84.4,40
M41  (via drill 0.3)
  Top 0.35: U401.16 73.87,47.87 75.2,49.2 77.2,49.2 v84.4,42 84.8,41.6 85.83,41.6 R411.1
  Top 0.5: v84.4,42 85.68,42 R411.1
  Bottom 0.5: JP401.10 88.47,37.93 v84.4,42
M42  (via drill 0.3)
  Top 0.35: U401.17 73.21,48.01 75.2,50 78.4,50 v84.4,44 84.8,43.6 85.79,43.6 R412.1
  Top 0.5: v84.4,44 85.7,44 R412.1
  Bottom 0.5: JP401.11 87.93,40.47 v84.4,44
M43  (via drill 0.3)
  Top 0.35: U401.18 72.58,48.17 75.2,50.8 80,50.8 v84.4,46.4 84.8,46 85.74,46 R413.1
  Top 0.5: v84.4,46.4 85.34,46.4 R413.1
  Bottom 0.5: JP401.12 87.79,43.01 v84.4,46.4
M44  (via drill 0.3)
  Top 0.35: U401.19 71.91,48.31 75.2,51.6 81.2,51.6 v84.4,48.4 84.8,48 85.77,48 R414.1
  Top 0.5: v84.4,48.4 85.37,48.4 R414.1
  Bottom 0.5: JP401.13 87.25,45.55 v84.4,48.4
M45  (via drill 0.3)
  Top 0.35: U401.20 71.25,48.45 75.2,52.4 82.4,52.4 v84.4,50.4 84.8,50 86.1,50 | 86.4,50 86.1,50 | 86.1,50 R415.1
  Top 0.5: v84.4,50.4 85.4,50.4 R415.1
  Bottom 0.5: JP401.14 86.71,48.09 v84.4,50.4
M46  (via drill 0.3)
  Top 0.35: U401.21 70.62,48.62 75.2,53.2 83.6,53.2 v84.4,52.4 84.8,52 85.83,52 R416.1
  Top 0.5: v84.4,52.4 85.43,52.4 R416.1
  Bottom 0.5: JP401.15 86.17,50.63 v84.4,52.4
M47  (via drill 0.3)
  Top 0.35: U401.22 69.96,48.76 75.2,54 v84.4,54
  Top 0.5: v84.4,54 85.86,54 R417.1
  Bottom 0.5: JP401.16 85.23,53.17 v84.4,54
M48  (via drill 0.3)
  Top 0.35: U501.7 69.96,60.44 75.2,55.2 84,55.2 v84.4,55.6 84.8,56 85.89,56 R502.1
  Top 0.5: v84.4,55.6 85.61,55.6 R502.1
  Bottom 0.5: JP501.1 85.2,56.4 v84.4,55.6
M49  (via drill 0.3)
  Top 0.35: U501.8 70.62,60.58 75.2,56 82.8,56 v84.4,57.6 84.8,58 85.91,58 R503.1
  Top 0.5: v84.4,57.6 85.57,57.6 R503.1
  Bottom 0.5: JP501.2 85.74,58.94 v84.4,57.6
M50  (via drill 0.3)
  Top 0.35: U501.9 71.25,60.75 75.2,56.8 81.6,56.8 v84.4,59.6 84.8,60 R504.1
  Top 0.5: v84.4,59.6 85.55,59.6 R504.1
  Bottom 0.5: JP501.3 86.28,61.48 v84.4,59.6
M51  (via drill 0.3)
  Top 0.35: U501.10 71.91,60.89 75.2,57.6 80.4,57.6 v84.4,61.6 84.8,62 85.92,62 R505.1
  Top 0.5: v84.4,61.6 85.52,61.6 R505.1
  Bottom 0.5: JP501.4 86.82,64.02 v84.4,61.6
M52  (via drill 0.3)
  Top 0.35: U501.11 72.58,61.02 75.2,58.4 79.2,58.4 v84.4,63.6 84.8,64 85.88,64 R506.1
  Top 0.5: v84.4,63.6 85.48,63.6 R506.1
  Bottom 0.5: JP501.5 87.36,66.56 v84.4,63.6
M53  (via drill 0.3)
  Top 0.35: U501.12 73.21,61.19 75.2,59.2 78,59.2 v84.4,65.6 84.8,66 85.85,66 R507.1
  Top 0.5: v84.4,65.6 85.45,65.6 R507.1
  Bottom 0.5: JP501.6 87.9,69.1 v84.4,65.6
M54  (via drill 0.3)
  Top 0.35: U501.13 73.87,61.33 75.2,60 76.8,60 v84.4,67.6 84.8,68 86.05,68 | 86.4,68 86.05,68 | 86.05,68 R508.1
  Top 0.5: v84.4,67.6 85.41,67.6 R508.1
  Bottom 0.5: JP501.7 88.44,71.64 v84.4,67.6
M55  (via drill 0.3)
  Top 0.35: U501.14 74.5,61.49 75.2,60.8 76.4,60.8 79.2,63.6 79.2,64.4 v84.4,69.6 84.8,70 85.78,70 R509.1 85.75,70.14
  Top 0.5: v84.4,69.6 85.38,69.6 R509.1
  Bottom 0.5: JP501.8 88.98,74.18 v84.4,69.6
M56  (via drill 0.3)
  Top 0.35: U501.15 74.5,69.7 75.2,70.4 83.2,70.4 v84.4,71.6 84.97,72.17 85.2,72.17 R510.1
  Top 0.5: v84.4,71.6 84.62,71.6 85.2,72.17
  Bottom 0.5: JP501.9 89.52,76.72 v84.4,71.6
M57  (via drill 0.3)
  Top 0.35: U501.16 73.87,69.87 75.2,71.2 82,71.2 v84.4,73.6 84.8,74 85.71,74 R511.1
  Top 0.5: v84.4,73.6 85.31,73.6 R511.1
  Bottom 0.5: JP501.10 90.06,79.26 v84.4,73.6
M58  (via drill 0.3)
  Top 0.35: U501.17 73.21,70.01 75.2,72 80.4,72 v84.4,76 84.8,76.4 85.77,76.4 R512.1
  Top 0.5: v84.4,76 85.68,76 R512.1
  Bottom 0.5: JP501.11 90.2,81.8 v84.4,76
M59  (via drill 0.3)
  Top 0.35: U501.18 72.58,70.17 75.2,72.8 79.2,72.8 v84.4,78 84.8,78.4 85.8,78.4 R513.1
  Top 0.5: v84.4,78 85.65,78 R513.1
  Bottom 0.5: JP501.12 90.74,84.34 v84.4,78
M60  (via drill 0.3)
  Top 0.35: U501.19 71.91,70.31 75.2,73.6 78,73.6 v84.4,80 84.8,80.4 85.83,80.4 R514.1
  Top 0.5: v84.4,80 85.61,80 R514.1
  Bottom 0.5: JP501.13 91.28,86.88 v84.4,80
M61  (via drill 0.3)
  Top 0.35: U501.20 71.25,70.45 75.2,74.4 76.8,74.4 v84.4,82 84.8,82.4 85.86,82.4 R515.1
  Top 0.5: v84.4,82 85.58,82 R515.1
  Bottom 0.5: JP501.14 91.82,89.42 v84.4,82
M62  (via drill 0.3)
  Top 0.35: U501.21 70.62,70.62 75.2,75.2 76,75.2 v84.4,83.6 84.8,84 85.55,84 R516.1
  Top 0.5: v84.4,83.6 84.4,84 85.2,84.8 85.49,84.8 R516.1
  Bottom 0.5: JP501.15 92.76,91.96 v84.4,83.6
M63  (via drill 0.3)
  Top 0.35: U501.22 69.96,70.76 74.8,75.6 74.8,77.6 83.2,86 v84.4,86 | R517.1 85.61,86.41
  Top 0.5: v84.4,86 85.5,86 R517.1
  Bottom 0.5: JP501.16 92.9,94.5 v84.4,86
  pour Top (no thermals): 85.6,87.2 85.6,85.6 84,85.6 83.6,86 83.6,86.4 84,86.8 84.4,86.8 84.8,87.2
MCLR
  Top 0.35: IC101.18 42.57,48.67 TP2.TP
  Top 0.4: R109.1 44.14,50.11 TP2.TP
N$1
  Top 0.5: D105.3 48.19,43.39 48.95,44.15 R107.2
N$2
  Top 0.2: D102.1 9.14,59.98 9.4,60.25 12.94,60.25 13.06,60.14 R103.1
  Top 0.35: JP101.D-1 8.35,58.34 D102.1
N$3
  Top 0.35: R102.1 11.21,56.42 D101.1 11.04,56.56 9.91,57.69 JP101.D+1
N$4
  Top 0.8: C606.2 24.02,77.22 23.6,76.8 21.77,76.8 D604.1 13.65,71.06 SG601.- 4.84,70.08 Q602.C
N$5
  Top 0.5: R105.1 35.91,70.22 Q101.2 35.88,73.07 C109.1
N$9
  Top 0.8: R606.1 D602.A
  pour Top (no thermals): 49.6,74 50.4,74 50.8,74.4 50.8,76.8 50.4,77.2 48.8,77.2 48.4,76.8 48.4,74.4 48.8,74
N$10  (via drill 0.3)
  Top 0.4: R604.1 24.42,46.82 v24.4,46.8 | v6.4,50.8 7.2,50 18.8,50 20.8,48 v20.8,46.8 | v5.6,79.6 5.6,76.69 R605.2
  Top 0.8: Q602.B 5.67,74.4 C603.1 5.63,76.51 R605.2
  Bottom 0.4: v20.8,46.8 v24.4,46.8 | v6.4,50.8 5.6,51.6 v5.6,79.6
N$13
  Top 0.35: U401.6 69.32,37.6 R401.1
N$17
  Top 0.35: U501.6 69.32,59.27 R501.1
N$18
  Top 0.8: R607.2 54.27,75.2 D603.A
  pour Top (no thermals): 54.4,74 55.2,74 55.6,74.4 55.6,76.8 55.2,77.2 53.6,77.2 53.2,76.8 53.2,74.4 53.6,74
N$21
  Top 0.6: JP103.2 D104.A
  pour Top (no thermals): 3.2,91.2 6,91.2 6.4,90.8 6.4,87.6 6,87.2 3.6,87.2 3.2,87.6
N$24
  Top 0.8: D602.C Q604.C
  pour Top (no thermals): 48.8,72 50.4,72 50.8,71.6 50.8,70 50.4,69.6 48.8,69.6 48.4,70 48.4,71.6
N$27
  Top 0.6: D103.A
  Top 0.8: JP102.2 D103.A
  pour Top (no thermals): 3.2,43.2 6,43.2 6.4,42.8 6.4,39.2 6,38.8 3.6,38.8 3.2,39.2
N$28
  Top 0.8: D603.C Q603.C
  pour Top (no thermals): 53.6,72 55.2,72 55.6,71.6 55.6,70 55.2,69.6 53.6,69.6 53.2,70 53.2,71.6
N$29  (via drill 0.3)
  Top 0.4: R611.2 19.75,67.35 29.6,77.2 45.6,77.2 v47.2,78.8 | v51.2,78.8 52,78 52,63.13 R608.1
  Top 0.8: Q603.B 53.33,63.75 C602.1 53.47,61.65 R608.1
  Bottom 0.4: v47.2,78.8 v51.2,78.8
N$30  (via drill 0.3)
  Top 0.4: R609.1 18.24,63.76 17.2,64.8 17.2,67.2 28,78 v43.6,78 | v50.8,59.6 49.6,59.6 48.8,60.4 48.8,61.48 R603.1
  Top 0.8: Q604.B 48.51,63.7 C607.1 48.59,61.7 R603.1
  Bottom 0.4: v50.8,59.6 47.6,62.8 47.6,76.8 46.4,78 v43.6,78
N$31  (via drill 0.3)
  Top 0.4: R614.2 v15.2,53.2 | v50,83.6 50,85.5 R615.2
  Top 0.5: Q605.B 49.96,87.58 C608.1 49.99,85.54 R615.2
  Bottom 0.4: v15.2,53.2 15.2,66.8 18.4,70 26,70 27.6,71.6 27.6,78.4 28.4,79.2 45.6,79.2 v50,83.6
N$32
  Top 0.35: U201.6 25.92,27.08 R203.2
N$34
  Top 0.5: U$601.- 47.25,95.2 48.8,95.2 49.45,94.55 D605.1 49.47,93.6 50,93.6 50.91,92.69 Q605.C
N$35
  Top 0.35: U301.26 R319.2
N$45
  Top 0.5: S101.1 S101.2 54.81,42.72 R101.1
  pour Top: 53.6,51.2 56,51.2 56,43.2 53.6,43.2
N$47
  Top 0.5: JP602.1 38.84,95.56 39.6,94.8 39.6,92.66 D601.1 39.2,91.33 39.2,90.4 38.25,89.45 Q601.C
  pour Top (no thermals): 37.6,96.4 37.6,94.8 38,94.4 40,94.4 40.4,94.8 40.4,96 40,96.4
N$48  (via drill 0.3)
  Top 0.4: R601.2 v12.53,51.33 v12.53,51.32 | v32.4,85.2 34.24,85.2 R602.2
  Top 0.5: Q601.B 36,88.15 C601.1 34.26,86.41 R602.2
  Bottom 0.4: v12.53,51.32 12.53,66.13 18,71.6 24.8,71.6 26,72.8 26,78.8 30,82.8 30,84 31.2,85.2 v32.4,85.2
N$53
  Top 0.35: U401.26 67.37,49.82 R419.2
N$62_
  Top 0.35: U501.26 67.37,71.74 R519.2
N$64
  Top 0.35: U201.26 R214.2 | R214.2
OSC1
  Top 0.35: IC101.30 35.57,62.77 36.8,64 36.8,65.2 37.6,66 40.8,66 41.6,66.8 41.6,67.67 R104.1
  Top 0.5: R104.1 41.42,68.95 Q101.1 42.72,73.07 C108.1
OSC2
  Top 0.35: IC101.31 34.98,63.38 36,64.4 36,65.6 37.61,67.21 R105.2
  Top 0.5: R105.2 R104.2
PGC
  Top 0.35: TP1.TP 37.48,51.5 IC101.16
PGD
  Top 0.35: TP3.TP 39.55,50.56 IC101.17
RA
  Bottom 0.3: R613.2 72.35,95.95 72.8,96.4 77.74,96.4 78.17,95.98 78.17,94.86 C604.1
  Bottom 0.5: C604.1 78.18,92.78 R612.1 78.08,90.44 JP601.2
RA_2  (via drill 0.3)
  Top 0.35: R610.1 41.22,53.39 C605.1 40.6,53 40.4,53.2 40.31,53.2 IC101.20 38.38,55.18 38.4,55.2
  Top 0.5: v46.8,55.6 44.94,55.6 R610.1
  Bottom 0.5: R613.1 58.45,94.05 56.8,92.4 56.8,58.8 53.6,55.6 v46.8,55.6
SCLK  (via drill 0.3)
  Top 0.35: U201.4 26.8,28.4 v23.6,31.6 | U301.4 49.2,28.4 v46,31.6 | U401.4 68,38.4 v64.8,35.2 | U501.4 68,60.4 v64.8,57.2 | 30.14,51.74 29.2,50.8 v29.2,49.6
  Top 0.4: IC101.9 30.14,51.74
  Bottom 0.35: v23.6,31.6 v46,31.6 62.4,31.6 64.8,34 v64.8,35.2 v64.8,57.2
  Bottom 0.4: v29.2,49.6 19.6,40 19.6,32.4 20.4,31.6 v23.6,31.6 | JP601.9 67.62,86.42 64.8,83.6 v64.8,57.2
SIN  (via drill 0.3)
  Top 0.35: IC101.1 24.95,55.57 24.95,55.56 24.67,55.28 v24.67,55.15 | U201.5 25.86,27.74 v23.6,30
  Bottom 0.4: v23.6,30 19.2,30 18.4,30.8 18.4,49.2 24.27,55.07 24.67,55.07 v24.67,55.15
SOUT201
  Top 0.35: U201.24 U301.5
SOUT301
  Top 0.35: U301.24 65.83,27.74 68.66,30.57 U401.5
SOUT401
  Top 0.35: U401.24 U501.5
TM_EN
  Top 0.35: R601.1 25.23,51.33 IC101.5
U_MCLR
  Top 0.5: R109.2 48.8,50.11 | 48.8,50.11 50.62,50.11 S101.3 S101.4 51.01,41.03 C112.1 | R107.1 48.95,49.96 48.8,50.11
  pour Top: 48,51.2 52,51.2 52,48.4 48,48.4
  pour Top: 52,43.2 50,43.2 50,48.8 52,48.8
USB_IN  (via drill 0.3)
  Top 0.35: C114.1 24.7,65.42 IC101.39
  Top 0.5: R106.1 14.85,63.95 v17.2,61.6 | v23.2,65.2 23.2,65.95 R108.1
  Top 0.6: R108.1 C114.1
  Bottom 0.5: v17.2,61.6 19.6,61.6 v23.2,65.2
USBCON
  Top 0.35: R609.2 25.3,62.55 IC101.41
USBTXRX
  Top 0.35: R611.1 24.98,64.01 IC101.40
VCC  (via drill 0.3)
  Top 0.2: 11.47,8.66 R205.2
  Top 0.35: 57.2,30.44 U301.28 | 65.95,46.4 U401.28 | 65.94,68.4 U501.28 | C119.1 40,64 38.8,62.8 37.84,62.8 IC101.28 | C117.1 28.4,50.8 28.4,52.23 IC101.7 | 34.8,30.43 U201.28
  Top 0.4: 22.4,48 22.4,46.4 23.2,45.6 26.8,45.6 27.6,44.8 27.6,44
  Top 0.45: 64.21,44.4 60,44.4 59.6,44 58.8,43.2 58.8,37.6 | v44,43.2 44,41.6 44.8,40.8 | 44.8,40.8 40,40.8 38,42.8 | 44.8,40.8 47.09,40.8 D105.1
  Top 0.5: 57.2,30.44 57.2,31.2 56.4,32 C115.1 55.39,35.81 54.4,36.8 | 65.95,46.4 65.2,46.4 64.4,45.6 C113.1 64.21,44.4 | 65.94,68.4 65.2,68.4 64.4,67.6 C118.1 61.79,66.59 59.6,64.4 | D605.3 46.98,91.42 46.4,92 46.4,93.34 U$601.+ | C117.1 24.06,49.66 22.4,48 | Z101.3 26.25,41.85 26.4,42 | 26.4,42 26.8,42.4 26.8,42.8 | 26.8,42.8 26.8,44 27.6,44 v39.2,44 | C119.1 44.4,64 46.8,61.6 46.8,59.6 48.8,57.6 v48.8,53.6 | 32.99,37.2 C116.1 34,32 34.8,31.2 34.8,30.43 | 54.4,36.8 38,36.8 | 38,36.8 33.39,36.8 32.99,37.2 | 54.4,36.8 58,36.8 58.8,37.6 60.55,35.84 R319.1 | 59.6,64.4 59.6,50 | 59.6,50 59.6,44 | R214.1 38.08,36.72 38,36.8 | R419.1 59.77,49.83 59.6,50 | R519.1 61.35,71.75 59.8,70.2 | 59.8,70.2 59.6,70 59.6,64.4 | 32.99,37.2 32.99,39.41 30.8,41.6 26.8,41.6 26.4,42 | 38,42.8 26.8,42.8 | JP601.10 67.62,91.58 66,93.2 58.8,93.2 57.6,92 57.6,82 59.6,80 59.6,70.4 59.8,70.2 | v51.6,56.8 v51.6,54.4
  Top 0.6: D605.3 48.5,91.3 47.6,90.4 47.6,82.64 R606.2 R607.1 56.42,80.78 58,79.2 58,57.2 v53.2,52.4
  Top 0.8: R517.2 87.81,84.38 | 87.81,84.38 R516.2 | 87.81,84.38 87.81,82.35 R515.2 R514.2 R513.2 R512.2 R511.2 R510.2 R509.2 R508.2 R507.2 R506.2 R505.2 R504.2 R503.2 R502.2 R417.2 R416.2 R415.2 R414.2 R413.2 R412.2 R411.2 R410.2 R409.2 R408.2 R407.2 R406.2 R405.2 R404.2 R403.2 87.85,24 | 87.85,24 R402.2 | 13.49,8.65 R208.2 | R208.2 R209.2 15.68,8.8 17.6,8.8 17.59,8.79 R210.2 R211.2 R212.2 R213.2 R215.2 R216.2 R217.2 R218.2 R219.2 R220.2 37.46,8.66 37.6,8.8 37.82,8.8 R221.2 39.98,8.67 R222.2 R223.2 R302.2 R303.2 48.12,8.66 R304.2 R305.2 R306.2 R307.2 R308.2 R309.2 R310.2 R311.2 R312.2 R313.2 68.45,8.66 R314.2 R315.2 R316.2 R317.2 81.46,8.66 87.6,14.8 87.6,23.75 87.85,24 | D103.C 11.57,46.3 C106.+ 12.67,45.2 14,45.2 17.47,41.73 C104.1 C105.1 24.72,41.73 Z101.3 24.68,42.01 TP4.TP 24.62,43.6 | R205.2 5.35,8.65 2.4,11.6 2.4,47.6 3.6,48.8 16,48.8 20,44.8 26,44.8 26.8,44 | R208.2 11.47,8.66 | 26.1,43.5 26.8,42.8
  Bottom 0.5: v48.8,53.6 v39.2,44 | JP601.10 JP601.8 JP601.6 72.7,90.7 74.68,92.68 R612.2 76.28,92.68 76.4,92.8 | R207.2 49.1,59.3 v51.6,56.8 | v51.6,54.4 51.6,54 v53.2,52.4
  Bottom 0.6: v53.2,52.4 v44,43.2
  pour Top (no thermals): 47.2,82.4 53.2,82.4 56,82.4 56.8,81.6 57.6,80.8 57.6,80 46,80 46,81.6 46.8,82.4
  pour Top (no thermals): 10.8,9.2 6.4,9.2 4.8,7.6 4.8,6.4 4.8,6 82.8,6 89.6,12.8 90,13.2 90.4,13.6 90.4,89.2 90,89.6 88,89.6 87.2,88.8 87.2,15.2 81.2,9.2
  pour Top (no thermals): 8,45.2 3.6,45.2 3.6,47.2 4.4,48 14.4,48 19.6,42.8 25.2,42.8 27.2,44.8 28.4,44.8 28.4,41.2 28,40.8 26.4,40.8 26,41.2 14.8,41.2 14,42 11.2,42
  pour Top (no thermals): 34,37.2 33.2,38 33.2,36 33.2,35.6 34,36.4
  pour Top (no thermals): 37.6,36 36.8,36.8 38.8,36.8 39.2,36.8 38.4,36
  pour Top (no thermals): 55.2,36 55.6,36 56.4,36.8 54.4,36.8
  pour Top: 59.6,50.8 60,50.8 60.4,50.4 60.4,49.6 60,49.2 59.6,49.2
  pour Top (no thermals): 60.8,65.6 60,66.4 59.6,66.4 59.6,64.4
  pour Top (no thermals): 60.8,71.2 59.6,72.4 59.6,70
VM
  Top 0.35: R614.1 24.85,53.2 IC101.3
VPRG_
  Top 0.35: U301.6 48.34,27.08 R301.1
VUSB
  Top 0.4: JP101.VBUS1 6.44,63.88 C110.1
  Top 0.5: C110.1 9.48,63.94 R106.2
VUSB_
  Top 0.35: C111.1 27.72,64.66 IC101.37
  Top 0.5: C111.1 C107.1
XLAT  (via drill 0.3)
  Top 0.4: IC101.26 40.1,62.8 v41.8,62.8
  Bottom 0.4: v41.8,62.8 41.8,61.47 R202.1
XLAT_  (via drill 0.3)
  Top 0.35: v63.2,58 64.4,58 67.37,60.97 U501.3 | U201.3 27.37,29.03 24.8,31.6 v24.8,33.2 | U301.3 49.77,29.03 47.2,31.6 v47.2,33.2 | U401.3 67.37,38.97 64.8,36.4 v63.2,36.4
  Top 0.4: v22.2,35 v22.2,33.2
  Bottom 0.35: v63.2,58 v63.2,36.4 63.2,34.8 61.6,33.2 v47.2,33.2
  Bottom 0.4: 22.18,35.42 v22.2,35 22.2,35.8 41.78,55.38 R202.2 | v22.2,33.2 v24.8,33.2 v47.2,33.2 | v63.2,58 63.2,86.94 JP601.13

## Text on the board
Bottom: DIDV_-_Baixa_Latencia